# EAGLE board Control board (EAGLE 9.6.2)
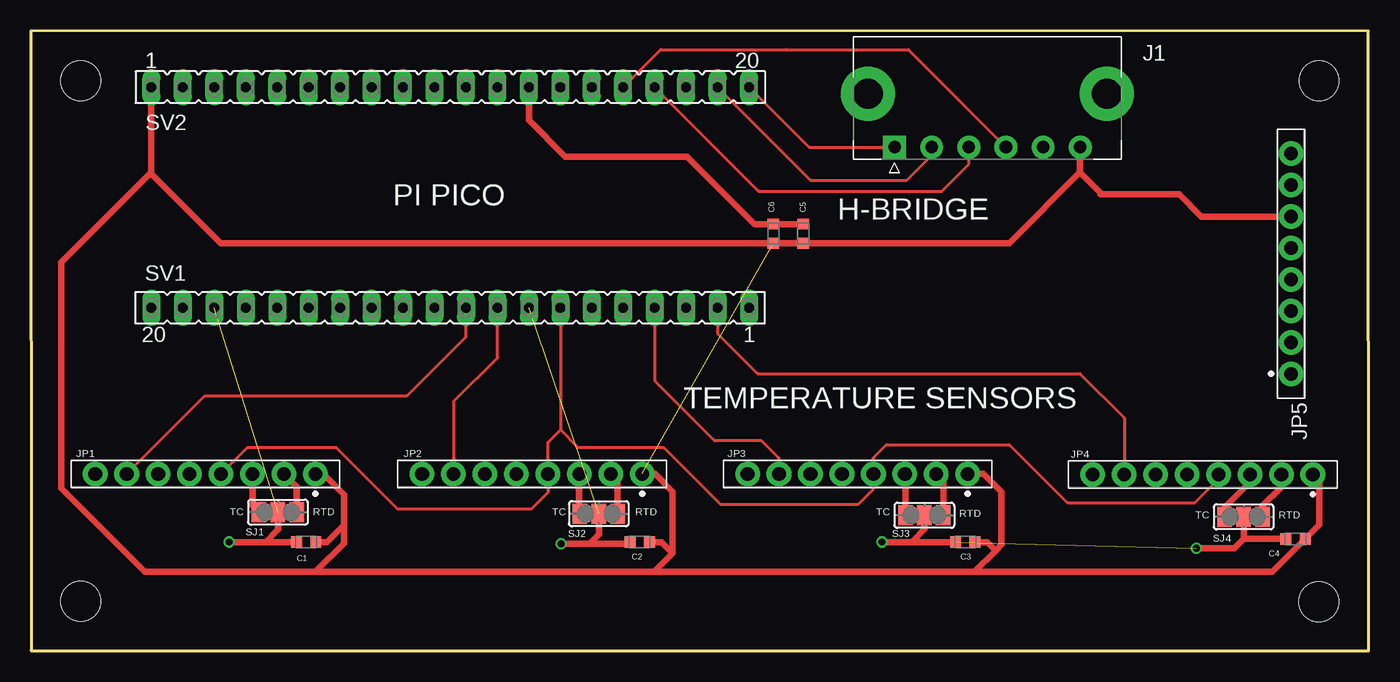
[diagram p0: board, top side]
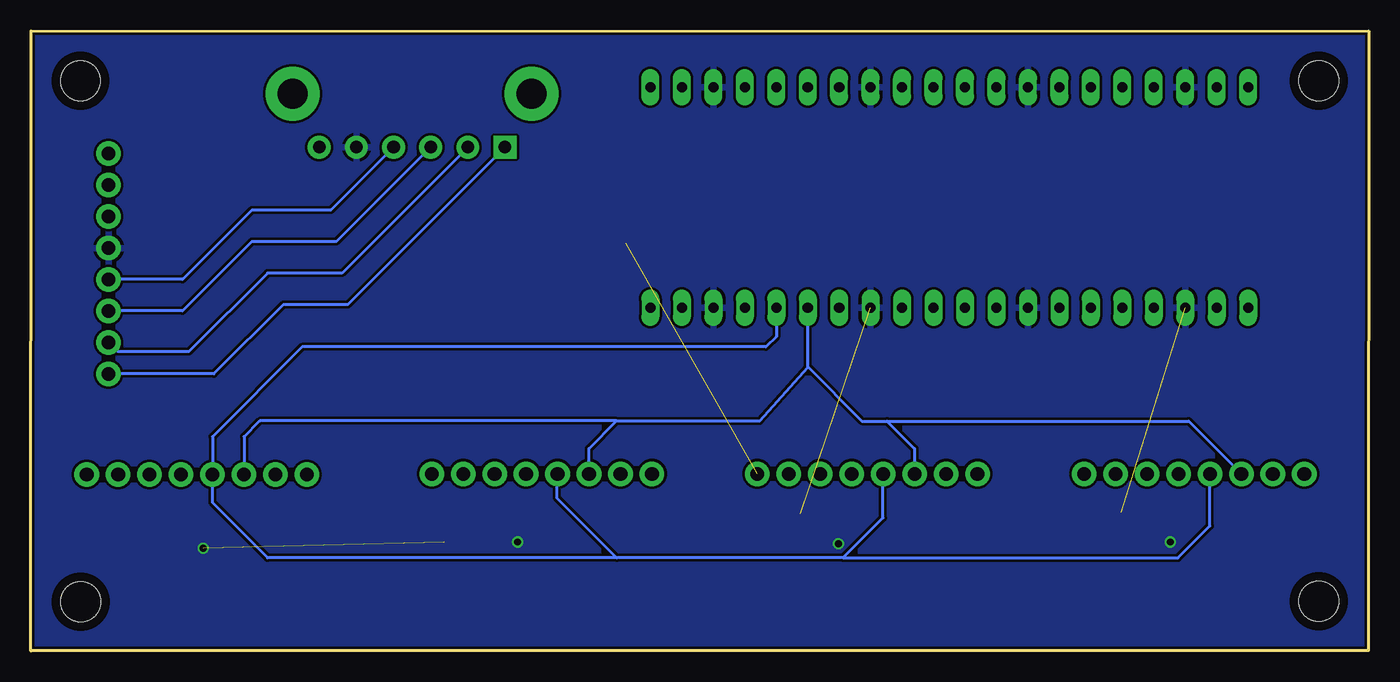
[diagram p1: board, bottom side, seen from below]

Size 108.01 x 50.04 mm. Coordinates in mm from the lower left corner, seen from the top.
Outline: 0.01,0.02 108.01,0 108,50.02 0,50.04 0.01,0.02
Copper layers (1*16): Top 0.035mm / dielectric 1.6mm / Bottom 0.035mm
Design rules "jlcpcb-2layers": minimum track width 5mil, minimum drill 0.3mm, track to track 5mil, track to pad 5mil, pad to pad 5mil, via to via 5mil, smd to smd 5mil, copper to edge 0.2mm, drill to drill 6mil, minimum pad ring 10mil, minimum via ring 3mil, stop-mask expansion 4mil, vias tented up to drill 0mil, thermal gap 10mil
Net classes: 0 default: clearance 0.205 mm
Holes 3.2 mm at 103.98,3.98 104.01,46.03 4.02,46.02 4.01,4.02
tRestrict: area 1.9,1.9 to 6.1,6.1; area 101.9,1.9 to 106.1,6.1; area 101.9,43.9 to 106.1,48.1; area 1.9,43.9 to 6.1,48.1
bRestrict: area 1.9,1.9 to 6.1,6.1; area 101.9,1.9 to 106.1,6.1; area 101.9,43.9 to 106.1,48.1; area 1.9,43.9 to 6.1,48.1
vRestrict: area 1.9,1.9 to 6.1,6.1; area 101.9,1.9 to 106.1,6.1; area 101.9,43.9 to 106.1,48.1; area 1.9,43.9 to 6.1,48.1

## Footprints (pad centres in the part's own frame; a part is rotated, then mirrored left to right if it is on the bottom)
CAPC1608X90N = smd 0.87 x 0.93: 1 -0.78,0; 2 0.78,0
MOLEX_436500603 = drill 1.02 pad 1.52 square: 1 0,0 | drill 1.02 pad 1.52: 2 -3,0; 3 -6,0; 4 -9,0; 5 -12,0; 6 -15,0 | drill 2.41 pad 2.91: S1 2.15,-4.32; S2 -17.15,-4.32
HDRVR8W64P254_1X8_2159X200X810B = drill 1.105 pad 1.705: 1 -8.89,0; 2 -6.35,0; 3 -3.81,0; 4 -1.27,0; 5 1.27,0; 6 3.81,0; 7 6.35,0; 8 8.89,0
SJ_2 = smd 1.168 x 1.6: 1 -1.524,0; 2 0,0; 3 1.524,0
FE20 = drill 0.813 long: 1 -24.13,0; 2 -21.59,0; 3 -19.05,0; 4 -16.51,0; 5 -13.97,0; 6 -11.43,0; 7 -8.89,0; 8 -6.35,0; 9 -3.81,0; 10 -1.27,0; 11 1.27,0; 12 3.81,0; 13 6.35,0; 14 8.89,0; 15 11.43,0; 16 13.97,0; 17 16.51,0; 18 19.05,0; 19 21.59,0; 20 24.13,0

## Placement (x,y rotation side)
C1  CL10A105KO8NNNC  [CAPC1608X90N]  22.24,8.78 180 top
C2  CL10A105KO8NNNC  [CAPC1608X90N]  49.16,8.78 180 top
C3  CL10A105KO8NNNC  [CAPC1608X90N]  75.45,8.78 180 top
C4  CL10A105KO8NNNC  [CAPC1608X90N]  102.12,9.04 180 top
C5  CL10A105KO8NNNC  [CAPC1608X90N]  62.37,33.68 90 top
C6  CL10A105KO8NNNC  [CAPC1608X90N]  59.95,33.68 90 top
J1  436500603  [MOLEX_436500603]  69.73,40.66 180 top
JP1  [HDRVR8W64P254_1X8_2159X200X810B]  14.08,14.29 180 top
JP2  [HDRVR8W64P254_1X8_2159X200X810B]  40.47,14.29 180 top
JP3  [HDRVR8W64P254_1X8_2159X200X810B]  66.76,14.29 180 top
JP4  [HDRVR8W64P254_1X8_2159X200X810B]  94.62,14.24 180 top
JP5  [HDRVR8W64P254_1X8_2159X200X810B]  101.75,31.25 90 top
SJ1  [SJ_2]  19.95,11.2 180 top
SJ2  [SJ_2]  45.86,11.07 180 top
SJ3  [SJ_2]  72.15,10.94 180 top
SJ4  [SJ_2]  97.93,10.81 180 top
SV1  [FE20]  33.86,27.7 180 top
SV2  [FE20]  33.86,45.5 0 top

## Library data of the parts
C1-C6 = SnapEDA Library
J1 = SnapEDA Library; MANUFACTURER: Molex; MAXIMUM_PACKAGE_HEIGHT: 5.57 mm; PARTREV: F3; STANDARD: Manufacturer Recommendations
JP1-JP5 = pinhead
SJ1-SJ4 = jumper
SV1 SV2 = con-lsta; OC_FARNELL: unknown; OC_NEWARK: unknown

## Nets
+5V: C1.1 C2.1 C3.1 C4.1 C5.1 C6.1 J1.6 JP1.1 JP2.1 JP3.1 JP4.1 JP5.6 SV2.1
CLK: JP1.4 JP2.4 JP3.4 JP4.4 SV1.7
CS0: JP3.7 SV1.4
CS1: JP2.7 SV1.9
CS2: JP1.7 SV1.10
CS3: JP4.7 SV1.2
CS4: SV1.12
GND: C1.2 C2.2 C3.2 C4.2 C5.2 C6.2 J1.5 JP5.5 SJ1.2 SJ2.2 SJ3.2 SJ4.2 SV1.3 SV1.8 SV1.13 SV1.18 SV2.3 SV2.8 SV2.13 SV2.18
MISO: JP1.5 JP2.5 JP3.5 JP4.5 SV1.5
MOSI: JP1.6 JP2.6 JP3.6 JP4.6 SV1.6
N$1: SV1.15
N$2: SV1.14
N$3: JP4.2 SJ4.1
N$4: JP1.3 SJ1.3
N$5: JP1.2 SJ1.1
N$6: JP2.3 SJ2.3
N$7: JP2.2 SJ2.1
N$8: JP3.3 SJ3.3
N$9: JP3.2 SJ3.1
N$10: JP4.3 SJ4.3
PIN1: SV1.20
PIN2: SV1.19
PIN4: SV1.17
PIN5: SV1.16
PIN11: SV1.11
PIN20: SV1.1
PIN26: SV2.15
PIN27: SV2.14
PIN29: SV2.12
PIN30: SV2.11
PIN31: SV2.10
PIN32: SV2.9
PIN34: SV2.7
PIN35: SV2.6
PIN36: SV2.5
PIN37: SV2.4
PIN39: SV2.2
PWM1: J1.1 JP5.1 SV2.20
PWM2: J1.2 JP5.2 SV2.19
PWM3: J1.3 JP5.3 SV2.17
PWM4: J1.4 JP5.4 SV2.16

## Tracks (layer width: path | path; a pad name or v marks a point on that pad's centre or on a via)
+5V  (1 unrouted)
  Top 0.508: SV2.1 9.73,38.64 | 9.73,38.64 9.73,38.5 15.31,32.91 79,32.91 84.72,38.63 | 9.73,38.64 2.45,31.36 2.45,13.12 9.2,6.37 22.95,6.37 | 22.95,6.37 50.3,6.37 | 50.3,6.37 76.19,6.37 | JP1.1 23.6,14.29 25.28,12.61 25.28,10.18 | 22.95,6.37 25.28,8.7 25.28,10.18 | JP2.1 50.38,14.29 51.83,12.84 51.83,7.89 | JP3.1 76.92,14.29 78.37,12.84 78.37,8.55 77.91,8.1 | 76.19,6.37 77.91,8.1 | C1.1 23.89,8.78 25.28,10.18 | C3.1 77.23,8.78 77.91,8.1 | 103.45,14.24 JP4.1 104.02,13.74 104.02,10.16 C4.1 100.23,6.37 76.19,6.37 | 50.3,6.37 51.83,7.89 | 51.83,7.89 50.94,8.78 C2.1 | C6.1 C5.1 | J1.6 84.72,40.65 84.72,38.63 | 84.72,38.63 86.37,36.98 86.37,36.85 92.72,36.85 94.51,35.06 JP5.6
CLK
  Top 0.254: SV1.7 42.75,17.84 | JP1.4 17.46,16.4 24.65,16.4 29.6,11.45 40.4,11.45 41.74,12.79 JP2.4 41.74,16.83 42.75,17.84 | JP4.4 95.9,13.86 93.99,11.96 83.7,11.96 79,16.66 69.1,16.66 68.03,15.59 JP3.4 68.03,13.05 66.81,11.83 55.69,11.83 51.12,16.4 44.18,16.4 42.75,17.84
CS0
  Top 0.254: SV1.4 50.37,21.8 55.21,16.96 59.01,16.96 60.41,15.56 JP3.7
CS1
  Top 0.254: SV1.9 37.67,23.68 34.12,20.13 JP2.7
CS2
  Top 0.254: JP1.7 14.03,20.59 30.36,20.59 35.13,25.36 SV1.10
CS3
  Top 0.254: SV1.2 55.45,25.61 58.68,22.37 84.72,22.37 88.28,18.82 JP4.7
GND  (via drill 0.55 pad 0.9)  (3 unrouted)
  Top 0.254: 48.25,8.66 C2.2 | SV1.13 27.44,27.76
  Top 0.508: v16.01,8.78 18.93,8.78 | 18.93,8.78 19.95,9.8 SJ1.2 | v42.81,8.66 45.09,8.66 | 45.09,8.66 45.86,9.42 SJ2.2 | 71.13,8.78 72.15,9.8 SJ3.2 | v68.72,8.78 71.13,8.78 | v94.12,8.28 97.17,8.28 97.93,9.04 | 97.93,9.04 SJ4.2 | 18.93,8.78 C1.2 | 45.09,8.66 48.25,8.66 | C3.2 71.13,8.78 | 97.93,9.04 C4.2 | SV2.13 40.21,42.84 43.14,39.9 52.99,39.9 58.43,34.46 C6.2 C5.2
  pour Bottom: 0.01,50.02 0.01,0.02 107.83,0.02 107.83,50.02
MISO
  Bottom 0.254: 42.43,7.51 39.2,10.74 JP2.5 | 42.43,7.51 15.39,7.51 12.81,10.1 JP1.5 | 60.72,7.51 65.54,12.34 65.54,14.24 JP3.5 | 42.43,7.51 60.72,7.51 | SV1.5 47.83,25.37 48.66,24.53 86.12,24.53 93.36,17.29 JP4.5 93.36,11.96 88.91,7.51 60.72,7.51
MOSI
  Bottom 0.254: 38.89,18.55 36.66,16.32 JP2.6 | JP3.6 62.95,16.32 60.71,18.56 | 60.71,18.56 89.55,18.56 90.82,17.29 JP4.6 | 38.89,18.55 40.92,18.55 45.29,22.92 SV1.6 45.29,22.91 49.15,18.56 60.71,18.56 | 38.89,18.55 14.53,18.55 JP1.6
N$3
  Top 0.508: JP4.2 100.98,13.23 99.45,11.7 SJ4.1
N$4
  Top 0.508: SJ1.3 17.89,11.73 JP1.3
N$5
  Top 0.508: SJ1.1 21.47,13.24 JP1.2
N$6
  Top 0.254: SJ2.3 44.28,11.12
  Top 0.508: 44.28,11.12 JP2.3
N$7
  Top 0.508: JP2.2 47.38,13.73 SJ2.1
N$8
  Top 0.508: JP3.3 70.62,14.24 SJ3.3
N$9
  Top 0.508: JP3.2 73.67,13.73 SJ3.1
N$10
  Top 0.508: JP4.3 98.44,13.61 96.4,11.58 SJ4.3
PWM1
  Top 0.254: SV2.20 62.83,40.66 J1.1
  Bottom 0.254: J1.1 82.43,27.96 87.64,27.96 93.24,22.36 JP5.1
PWM2
  Top 0.254: SV2.19 60.93,40.02 62.95,37.99 70.75,37.99 72.73,39.98 J1.2
  Bottom 0.254: J1.2 82.89,30.5 88.91,30.5 95.26,24.15 101,24.15 JP5.2
PWM3
  Top 0.254: SV2.17 58.76,37.1 73.54,37.1 75.73,39.29 J1.3
  Bottom 0.254: J1.3 83.35,33.04 90.18,33.04 95.78,27.44 JP5.3
PWM4
  Top 0.254: SV2.16 50.86,48.53 60.97,48.53 70.86,48.53 J1.4
  Bottom 0.254: J1.4 83.81,35.58 90.18,35.58 95.78,29.98 JP5.4

## Text on the board
tNames: H-BRIDGE | PI PICO | TEMPERATURE SENSORS | TC | RTD | TC | RTD | TC | RTD | TC | RTD